# EAGLE board UV_Curing-PCB (EAGLE 9.6.2)
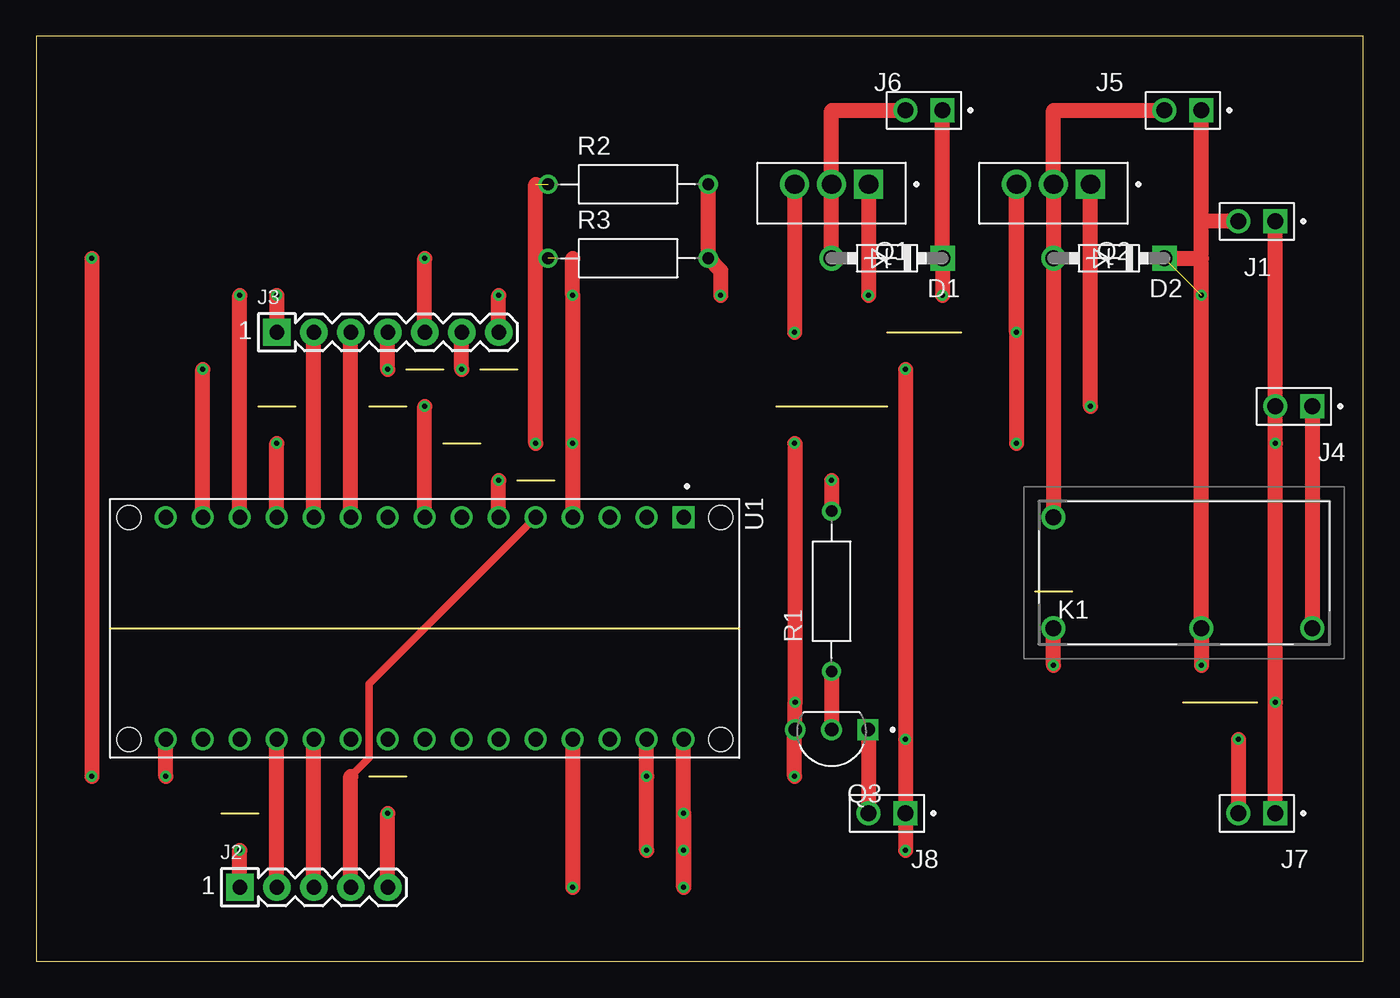
[diagram p0: board, top side]
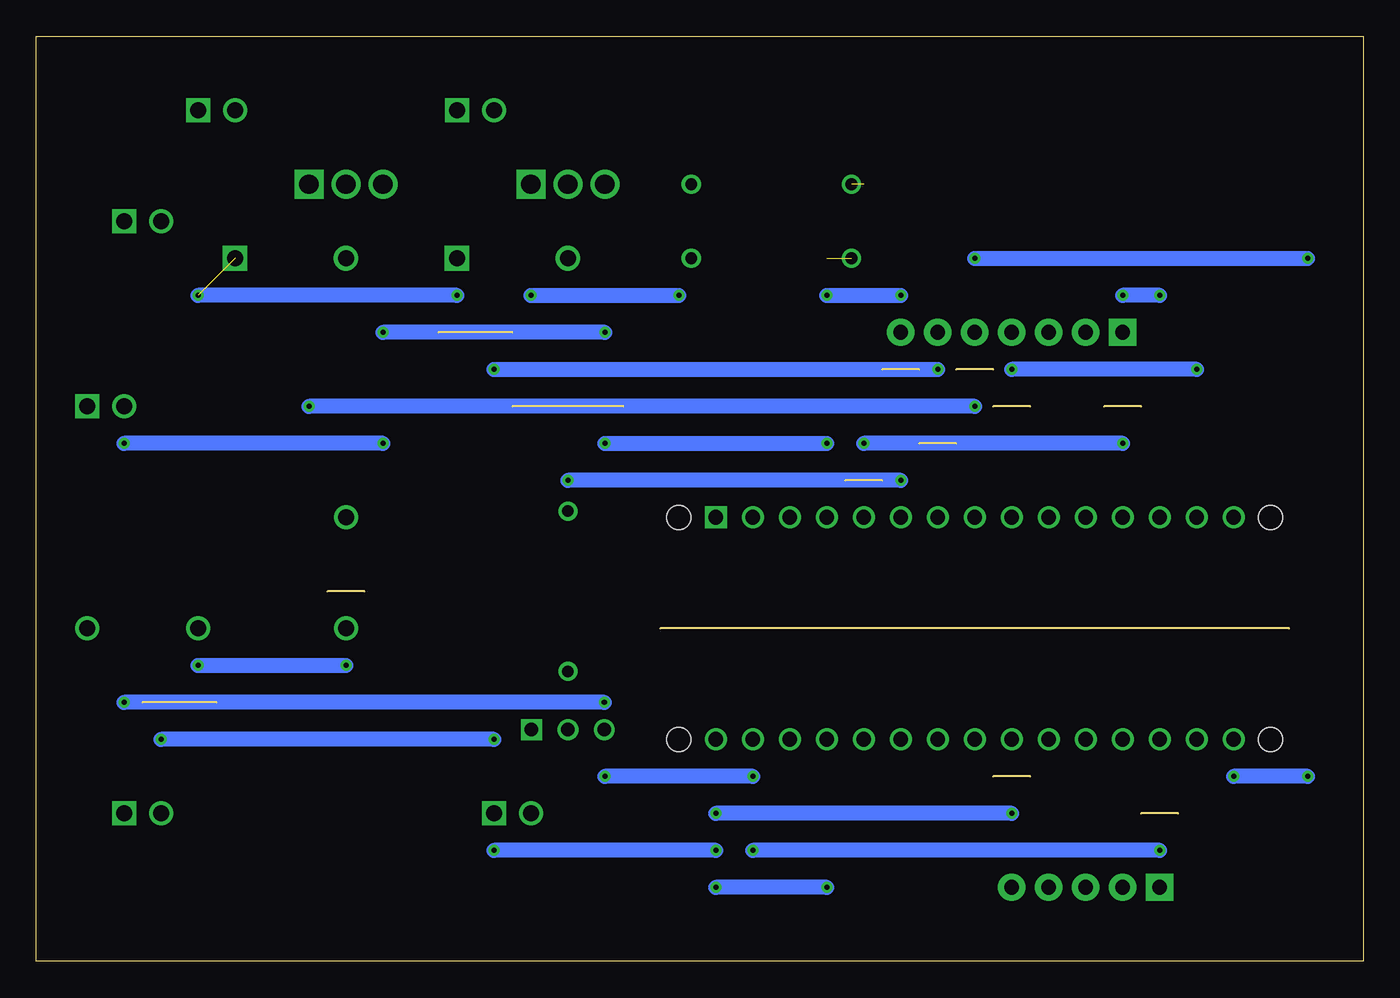
[diagram p1: board, bottom side, seen from below]

Size 91.11 x 63.49 mm. Coordinates in mm from the lower left corner, seen from the top.
Outline: 0,0 91.11,0 91.11,63.49 0,63.49 0,0
Copper layers (1*16): Top 0.035mm / dielectric 1.5mm / Bottom 0.035mm
Design rules "default": minimum track width 6mil, minimum drill 0.35mm, track to track 6mil, track to pad 6mil, pad to pad 6mil, via to via 6mil, smd to smd 6mil, copper to edge 40mil, drill to drill 6mil, minimum pad ring 10mil, minimum via ring 8mil, stop-mask expansion 4mil, vias tented up to drill 0mil, thermal gap 10mil
Milling: 13 lines

## Footprints (pad centres in the part's own frame; a part is rotated, then mirrored left to right if it is on the bottom)
DIOAD520W79L463D238 = drill 1.1 pad 1.7: A 3.81,0 | drill 1.1 pad 1.7 square: C -3.81,0
254-1X02-PIN = drill 1.1 pad 1.45 square: 01 -1.27,0 | drill 1.1 pad 1.45: 02 1.27,0
254-1X05-PIN = drill 1.016 pad 1.88 square: 1 0,0 | drill 1.016 pad 1.88: 2 2.54,0; 3 5.08,0; 4 7.62,0; 5 10.16,0
254-1X07-PIN = drill 1.016 pad 1.88 square: 1 0,0 | drill 1.016 pad 1.88: 2 2.54,0; 3 5.08,0; 4 7.62,0; 5 10.16,0; 6 12.7,0; 7 15.24,0
JY25HK505 = drill 1.1 pad 1.65: 8 0,0; 9 0,7.62; 13 -10.16,7.62; 16 -17.78,7.62
TO254P1016X419X2286-3 = drill 1.33 square: 1 -2.54,0 | drill 1.33: 2 0,0; 3 2.54,0
BJT-NPN-TO-92-3 = drill 0.93 pad 1.4 square: 1 -2.5,-0.655 | drill 0.93 pad 1.4: 2 0,-0.655; 3 2.5,-0.655
RES-THRU = drill 0.8 pad 1.2: 1 -5.5,0; 2 5.5,0
MODULE_A000005 = drill 1 square: 1 -7.62,17.78 | drill 1: 2 -7.62,15.24; 3 -7.62,12.7; 4 -7.62,10.16; 5 -7.62,7.62; 6 -7.62,5.08; 7 -7.62,2.54; 8 -7.62,0; 9 -7.62,-2.54; 10 -7.62,-5.08; 11 -7.62,-7.62; 12 -7.62,-10.16; 13 -7.62,-12.7; 14 -7.62,-15.24; 15 -7.62,-17.78; 16 7.62,-17.78; 17 7.62,-15.24; 18 7.62,-12.7; 19 7.62,-10.16; 20 7.62,-7.62; 21 7.62,-5.08; 22 7.62,-2.54; 23 7.62,0; 24 7.62,2.54; 25 7.62,5.08; 26 7.62,7.62; 27 7.62,10.16; 28 7.62,12.7; 29 7.62,15.24; 30 7.62,17.78 | hole 1.651: -7.62,-20.32; 7.62,-20.32; -7.62,20.32; 7.62,20.32

## Placement (x,y rotation side)
D1  400V  [DIOAD520W79L463D238]  58.42,48.26 180 top
D2  400V  [DIOAD520W79L463D238]  73.66,48.26 180 top
J1  12V_SUP  [254-1X02-PIN]  83.82,50.8 180 top
J2  PINHEADER-5POS-2.54MM  [254-1X05-PIN]  13.97,5.08 0 top
J3  PINHEADER-7POS-2.54MM  [254-1X07-PIN]  16.51,43.18 0 top
J4  UV_SUP  [254-1X02-PIN]  86.36,38.1 180 top
J5  UV_FN  [254-1X02-PIN]  78.74,58.42 180 top
J6  MOTOR  [254-1X02-PIN]  60.96,58.42 180 top
J7  5V_SUP  [254-1X02-PIN]  83.82,10.16 180 top
J8  SPKR  [254-1X02-PIN]  58.42,10.16 180 top
K1  25V  [JY25HK505]  69.85,30.48 180 top
Q1  55V  [TO254P1016X419X2286-3]  54.61,53.34 180 top
Q2  55V  [TO254P1016X419X2286-3]  69.85,53.34 180 top
Q3  30V 100mA  [BJT-NPN-TO-92-3]  54.61,15.24 180 top
R1  220E  [RES-THRU]  54.61,25.4 90 top
R2  1K  [RES-THRU]  40.64,53.34 0 top
R3  10K  [RES-THRU]  40.64,48.26 0 top
U1  A000005  [MODULE_A000005]  26.67,22.86 270 top

## Library data of the parts
D1 D2 = Up3D Active Components; DESCRIPTION: Diode, DO-41, 400V, 1A, 175C; DIGIKEY: 1N4004-TPMSCT-ND; MF: Diotec Semiconductor; MP: 1N4004
J1 J4-J8 = Up3D Misc; DESCRIPTION: Connector Header Through Hole 2 position 0.100 (2.54mm); DIGIKEY: 732-5315-ND; MF: Wurth Electronics; MP: 61300211121
J2 = Up3D Misc; DESCRIPTION: Connector Header Through Hole 5 position 0.100 (2.54mm); DIGIKEY: 732-5318-ND; MF: Wurth Electronics; MP: 61300511121
J3 = Up3D Misc; DESCRIPTION: Connector Header Through Hole 7 position 0.100 (2.54mm); DIGIKEY: 732-5320-ND; MF: Wurth Elektronik; MP: 61300711121
K1 = Up3D Active Components; DESCRIPTION: General Purpose Relays 5A N.O. PCB; MF: FUJITSU; MP: JY-25H-K-505
Q1 Q2 = Up3D Active Components; DESCRIPTION: MOSFET, Power,N-Ch,VDSS 55V,RDS(ON) 17.5 Milliohms,ID 49A,TO-220AB,PD 94W,-55C | Infineon IRFZ44NPBF; DIGIKEY: IRFZ44NPBF-ND; MF: Infineon; MP: IRFZ44NPBF
Q3 = Up3D Active Components; DESCRIPTION: TO-92 30V 0.1A NPN Bipolar Transistor; DIGIKEY: 2156-BC548BU-ND; MF: Taiwan Semiconductor; MP: BC549A
R1-R3 = Up3D Resistors; DESCRIPTION: 1.07 kOhms ±1% 0.25W, 1/4W Through Hole Resistor Axial - Metal Film; DIGIKEY: CFR200J1K0; MF: Yageo; MP: MFR-25FBF52-1K
U1 = Up3D ICs; DESCRIPTION: Arduino Nano Microcontroller Board, ATmega328 | Arduino A000005; MF: Arduino; MP: A000005

## Nets
3V3: U1.17
+5V: J2.5 J3.6 J7.02 J8.01 U1.27 U1.30
+12V: D1.C D2.C J1.02 J5.01 J6.01 K1.9 K1.13
DI_KEY: J2.4 U1.5
DI_S1: J2.2 U1.19
DI_S2: J2.3 U1.20
GND: J1.01 J2.1 J3.7 J4.02 J7.01 Q1.3 Q2.3 Q3.3 R3.1 U1.4 U1.29
MOTOR_SW: R2.1 U1.12
N$1: D1.A J6.02 Q1.2
N$2: J4.01 K1.16
N$3: Q1.1 R2.2 R3.2
N$4: D2.A J5.02 K1.8 Q2.2
N$5: J8.02 Q3.1
N$7: Q3.2 R1.1
OLED_CLK: J3.5 U1.16
OLED_CS: J3.1 U1.13
OLED_DC: J3.2 U1.11
OLED_MOSI: J3.4 U1.14
OLED_RST: J3.3 U1.10
SPEAKER_SW: R1.2 U1.6
UV_SW: Q2.1 U1.8

## Tracks (layer width: path | path; a pad name or v marks a point on that pad's centre or on a via)
+5V  (via drill 0.35)
  Top 1.016: J2.5 v24.13,10.16 | U1.30 v44.45,5.08 v44.45,10.16 v44.45,7.62 | U1.27 v36.83,5.08 | v29.21,40.64 J3.6 | v59.69,7.62 J8.01 v59.69,15.24 v59.69,40.64 | v82.55,15.24 J7.02
  Bottom 1.016: v24.13,10.16 v44.45,10.16 | v44.45,7.62 v59.69,7.62 | v36.83,5.08 v44.45,5.08 | v59.69,40.64 v29.21,40.64 | v59.69,15.24 v82.55,15.24
+12V  (via drill 0.35)  (1 unrouted)
  Top 1.016: v80.01,20.32 K1.13 80.01,48.26 | v69.85,20.32 K1.9 | J6.01 D1.C v62.23,45.72 | 80.01,48.26 80.01,50.8 | 80.01,50.8 J5.01 | D2.C 80.01,48.26 | J1.02 80.01,50.8
  Bottom 1.016: v80.01,20.32 v69.85,20.32 | v62.23,45.72 v80.01,45.72
DI_KEY
  Top 0.508: 21.59,12.7 22.86,13.97 22.86,19.05 U1.5
  Top 1.016: J2.4 21.59,12.7
DI_S1
  Top 1.016: J2.2 U1.19
DI_S2
  Top 1.016: J2.3 U1.20
GND  (via drill 0.35)  (1 unrouted)
  Top 1.016: J2.1 v13.97,7.62 | U1.29 v41.91,12.7 v41.91,7.62 | v52.07,12.7 52.07,15.86 Q3.3 v52.11,17.78 52.11,35.52 v52.07,35.56 | U1.4 v36.83,35.56 v36.83,45.72 36.83,48.26 | Q1.3 v52.07,43.18 | v67.31,43.18 Q2.3 v67.31,35.56 | J3.7 v31.75,45.72 | J7.01 v85.09,17.78 v85.09,35.56 J4.02 J1.01
  Bottom 1.016: v13.97,7.62 v41.91,7.62 | v41.91,12.7 v52.07,12.7 | v52.07,35.56 v36.83,35.56 | v52.11,17.78 v85.09,17.78 | v52.07,43.18 v67.31,43.18 | v67.31,35.56 v85.09,35.56 | v36.83,45.72 v31.75,45.72
MOTOR_SW  (via drill 0.35)  (1 unrouted)
  Top 1.016: U1.12 v16.51,35.56 | v34.29,35.56 34.29,53.34
  Bottom 1.016: v16.51,35.56 v34.29,35.56
N$1
  Top 1.016: D1.A Q1.2 54.61,58.42 J6.02
N$2
  Top 1.016: J4.01 K1.16
N$3  (via drill 0.35)
  Top 1.016: R2.2 R3.2 46.99,47.41 v46.99,45.72 | Q1.1 v57.15,45.72
  Bottom 1.016: v57.15,45.72 v46.99,45.72
N$4
  Top 1.016: K1.8 D2.A Q2.2 69.85,58.42 J5.02
N$5
  Top 1.016: Q3.1 57.15,15.86 J8.02
N$7
  Top 1.016: R1.1 Q3.2
OLED_CLK  (via drill 0.35)
  Top 1.016: J3.5 v26.67,48.26 | v3.81,48.26 v3.81,12.7 | v8.89,12.7 U1.16
  Bottom 1.016: v26.67,48.26 v3.81,48.26 | v3.81,12.7 v8.89,12.7
OLED_CS  (via drill 0.35)
  Top 1.016: U1.13 v13.97,45.72 | v16.51,45.72 J3.1
  Bottom 1.016: v13.97,45.72 v16.51,45.72
OLED_DC
  Top 1.016: U1.11 J3.2
OLED_MOSI  (via drill 0.35)
  Top 1.016: U1.14 v11.43,40.64 | v24.13,40.64 J3.4
  Bottom 1.016: v11.43,40.64 v24.13,40.64
OLED_RST
  Top 1.016: U1.10 J3.3
SPEAKER_SW  (via drill 0.35)
  Top 1.016: U1.6 v31.75,33.02 | v54.61,33.02 R1.2
  Bottom 1.016: v31.75,33.02 v54.61,33.02
UV_SW  (via drill 0.35)
  Top 1.016: U1.8 v26.67,38.1 | v72.39,38.1 Q2.1
  Bottom 1.016: v26.67,38.1 v72.39,38.1